# Altium PCB PCB1.PcbDoc (part 2 of 2)
Units mil, origin at the board's own origin, x right, y up, seen from the top; angles counter-clockwise.
Board outline 1023.62 x 2244.09 mil, 2 copper layers (Top Layer, Bottom Layer), stack 42.17 mil thick; 66 components, 139 nets, 332 pads, 153 vias.
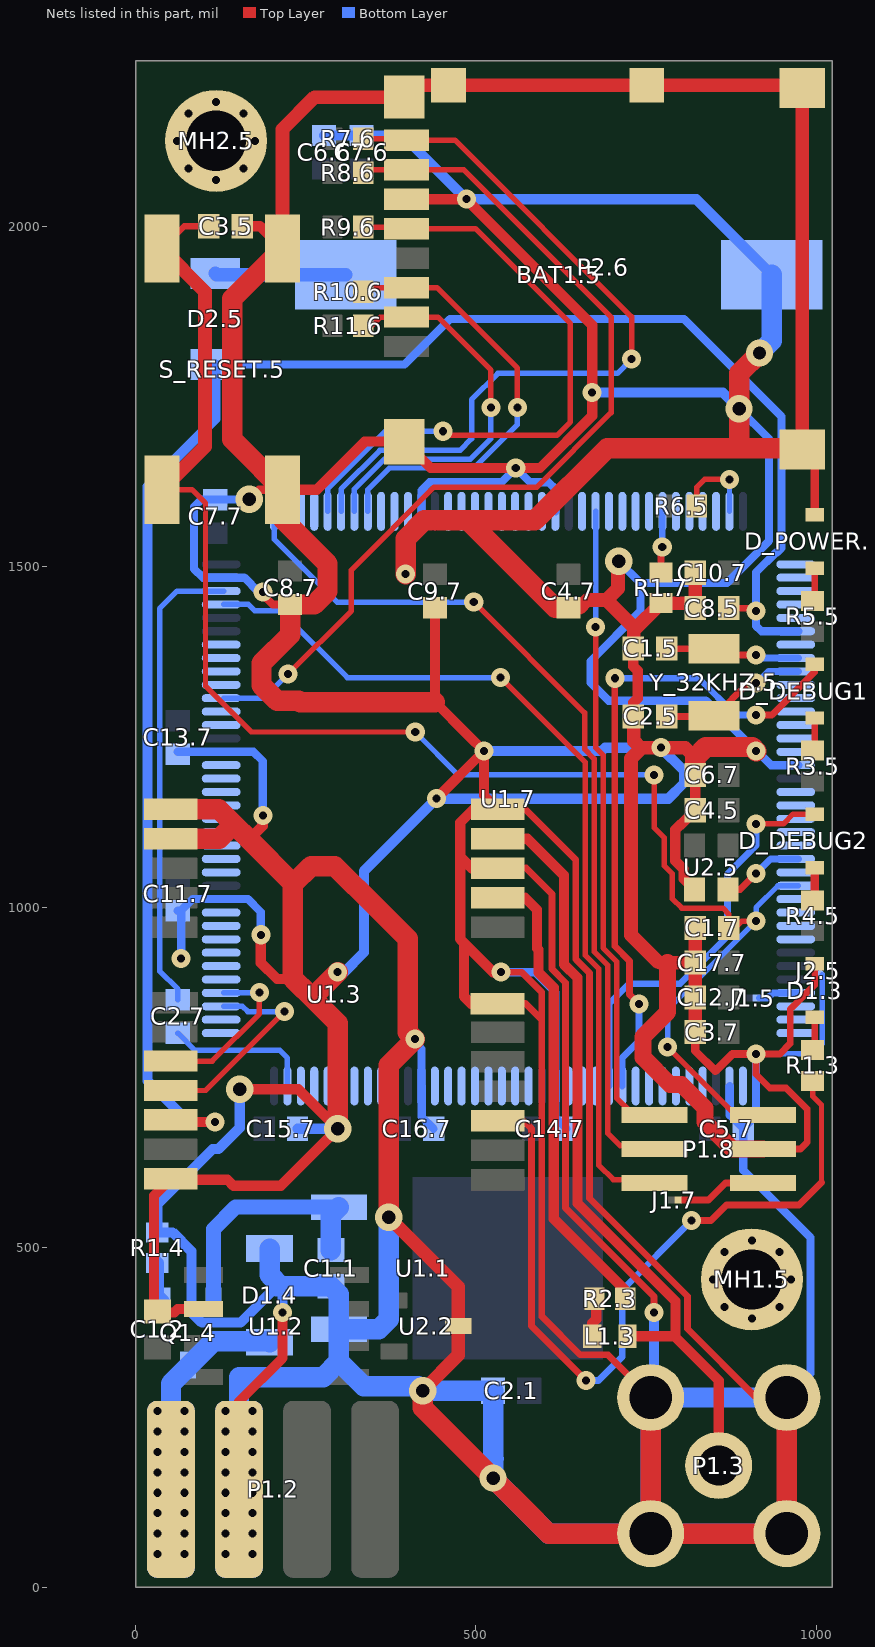
[diagram p2: the nets of this part, all layers, seen from the top]

## Via types
v1: diameter 23, hole 11.81, Top Layer to Bottom Layer, 64 vias
v2: diameter 28, hole 11.81, Top Layer to Bottom Layer, tented both sides, 57 vias
v3: diameter 28, hole 11.81, Top Layer to Bottom Layer, 16 vias
v4: diameter 40, hole 19.68, Top Layer to Bottom Layer, tented both sides, 14 vias
v5: diameter 43.31, hole 43.31, Top Layer to Bottom Layer, tented both sides, 1 vias
v6: diameter 55.12, hole 55.12, Top Layer to Bottom Layer, tented both sides, 1 vias

## Nets (pads, with @x,y where several pads share a name; then routed paths per layer and width w, separated by ;. In a path a pad name is that pad's centre, name@x,y a point inside that pad or via, vN(x,y) a via of type N, cw(c..) or ccw(c..) an arc to the next point about the centre after c; other vN are vias at no path point) (continued)
GND: BAT1.5.2 C1.1.1 C1.2.1 C1.5.1 C1.7.1 C2.1.1 C2.5.1 C3.5.1 C3.7.1 C4.5.1 C4.7.1 C5.7.1 C6.6.1 C6.7.1 C7.6.1 C7.7.1 C8.5.1 C8.7.1 C9.7.1 C10.7.1 C11.7.1 C12.7.1 C13.7.1 C14.7.1 C15.7.1 C16.7.1 C17.7.1 D1.3.2 D1.4.1 D_POWER.5.2 J2.5.1 MH1.5.MOUNTING MH2.5.MOUNTING P1.2.2 P1.3.2 P1.3.3 P1.3.4 P1.3.5 P1.8.3 P2.6.6 P2.6.GND R1.4.2 R1.7.1 S_RESET.5.2 S_RESET.5.4 U1.1.1 U1.2.2 U1.3.7 U1.3.10 U1.3.12 U1.3.13 U1.3.14 U1.3.24 U1.7.16 U1.7.38 U1.7.51 U1.7.61 U1.7.83 U1.7.94 U1.7.107 U1.7.120 U1.7.130 U2.2.3 U2.5.2 | length 23318.4
  Top Layer w10: v2@525.47,904.25 v2(536.81,904.25) 566.81,904.25 596.81,874.25 596.81,834.25 ; U1.3.7@531.65,858.03 573.03,858.03 596.81,834.25 ; U1.3.10@531.97,1057.17 573.9,1057.17 611.81,1019.25 611.81,908.75 631.81,888.75 631.81,557.53 761.81,427.53 v2(761.81,404.25) ; U1.3.12@531.97,1143.78 572.28,1143.78 646.81,1069.25 646.81,923.25 666.81,903.25 666.81,572.03 810.81,428.03 810.81,380.25 911.81,279.25 P1.3.5@956.81,279.25 ; P1.3.4@756.81,279.25 694.13,341.93 653.3,341.93 596.81,398.42 596.81,834.25 ; P1.8.3@921.81,644.25 976.81,644.25 986.81,654.25 986.81,703.43 955.99,734.25 931.81,734.25 911.81,754.25 v2(911.81,784.25) 946.81,784.25 961.81,799.25 961.81,849.25 997.81,885.25 D1.3.2@997.81,916.62
  Top Layer w12: v4(166.81,1599.25) 180.94,1613.39 S_RESET.5.2@215.67,1613.39 ; v2(186.81,1463.25) 186.81,1459.25 201.42,1444.65 C8.7.1@226.81,1444.65 ; C3.7.1@822.2,816.25 822.2,788.86 851.81,759.25 876.81,784.25 v2(911.81,784.25) ; P2.6.GND@979.35,1672.23 997.81,1653.76 D_POWER.5.2@997.81,1576.62
  Top Layer w15: U1.3.24@51.65,599.25 134.81,599.25 143.51,590.55 213.11,590.55 v4(296.81,674.25) 238.81,732.25 v4(152.81,732.25) ; U1.3.24@51.65,600.47 26.81,575.63 26.81,410.83 C1.2.1@31.81,405.83 33.39,404.25 56.81,404.25 61.81,409.25 U1.2.2@99.53,409.25 ; P1.2.2@151.81,144.25 151.81,273.25 215.67,337.11 v2(215.67,404.25) ; C3.5.1@156.69,2000.55 182.83,2000.55 S_RESET.5.4@215.67,1967.72 ; 166.81,1099.25 186.81,1119.25 v2(186.81,1134.25) ; v2(183.81,959.25) 183.81,918.25 207.81,894.25 231.81,894.25 ; S_RESET.5.2@215.67,1613.39 265.94,1613.39 336.6,1684.04 P2.6.GND@394.7,1684.04 433.49,1645.25 v2(558.48,1645.25) 594.23,1645.25 670.81,1721.83 v2(670.81,1756.25) 670.81,1855.25 v2(485.81,2040.25) 485.72,2040.34 P2.6.6@398.24,2040.34 ; P2.6.GND@394.7,2190.34 P2.6.GND@412.22,2207.86 ; C9.7.1@439.81,1439.65 439.81,1301.25 488.88,1252.19 v2(511.81,1229.25) ; v2(441.81,1159.25) v2(511.81,1229.25) ; U2.2.3@474.06,384.25 U2.2.3@474.31,384 ; v2@525.47,904.25 482.31,947.41 ; U1.3.7@531.65,858.03 493.03,858.03 482.31,868.75 482.31,947.41 ; U1.3.10@531.97,1057.17 493.9,1057.17 476.81,1074.25 ; C2.5.1@731.2,1280.25 731.2,1300.1 737.81,1306.7 737.81,1347.25 731.2,1353.86 C1.5.1@731.2,1380.25 ; P1.3.3@756.81,74.25 P1.3.3@756.81,79.25 ; U2.5.2@821.2,1025.77 805.31,1041.67 805.31,1055.48 792.96,1067.84 792.96,1113.63 800.28,1120.95 800.9,1120.95 C4.5.1@822.2,1142.25 C6.7.1@822.2,1194.25 ; P2.6.GND@975.21,2207.86 P2.6.GND@979.35,2203.72 ; 476.81,1074.25 476.81,952.91 482.31,947.41 ; 476.81,1074.25 476.81,1124.25 496.34,1143.78 U1.3.12@531.97,1143.78 511.81,1163.94 v2(511.81,1229.25)
  Top Layer w20: S_RESET.5.4@215.67,1967.72 215.67,2143.11 262.9,2190.34 P2.6.GND@394.7,2190.34 ; v4(371.81,544.25) 474.06,442.01 U2.2.3@474.06,384.25 474.06,341.5 v4(421.81,289.25) ; P2.6.GND@412.22,2207.86 P2.6.GND@459.66,2207.86 P2.6.GND@751,2207.86 P2.6.GND@975.21,2207.86 ; C4.7.1@635.81,1439.65 652.12,1439.65 663.73,1451.25 691.89,1451.25 ; v4(709.81,1508.25) 708.81,1507.25 708.81,1468.17 691.89,1451.25 ; C2.5.1@734.81,1283.86 C2.5.1@731.2,1280.25 732.2,1243.86 741.81,1234.25 ; C1.5.1@734.81,1376.65 C1.5.1@731.2,1380.25 732.2,1407.01 ; 766.81,919.91 727.81,958.91 727.81,1218.34 741.81,1232.34 741.81,1234.25 ; 770.81,918.25 781.81,918.25 C17.7.1@822.2,918.25 ; C3.7.1@822.2,816.25 C12.7.1@822.2,867.25 C17.7.1@822.2,918.25 ; C1.7.1@822.2,969.25 C17.7.1@822.2,918.25 ; 822.2,1219.65 807.6,1234.25 v2(771.81,1234.25) 741.81,1234.25 ; C10.7.1@822.2,1491.25 C8.5.1@822.2,1439.25 814.84,1446.61 R1.7.1@771.81,1446.61 732.2,1407.01 ; P2.6.GND@979.35,1672.23 P2.6.GND@979.35,2203.72 ; 691.89,1451.25 732.2,1410.94 732.2,1407.01
  Top Layer w25: 781.81,918.25 781.81,845.87 745.31,809.37 745.31,779.13 785.19,739.25 802.15,739.25 836.81,704.59 836.81,684.25 876.81,644.25 P1.8.3@921.81,644.25
  Top Layer w30: U1.3.14@51.65,1100.47 123.03,1100.47 144.31,1121.75 ; U1.3.13@51.65,1143.78 122.28,1143.78 144.31,1121.75 ; S_RESET.5.4@215.67,1967.72 141.81,1893.86 141.81,1698.62 141.81,1687.24 152.87,1676.18 S_RESET.5.2@215.67,1613.39 215.67,1570.39 281.81,1504.25 281.81,1464.25 262.2,1444.65 C8.7.1@226.81,1444.65 226.81,1400.41 184.81,1358.41 184.81,1326.1 207.66,1303.25 239.97,1303.25 241.97,1301.25 439.81,1301.25 ; 231.81,1034.25 231.73,1034.33 166.81,1099.25 144.31,1121.75 ; v4(296.81,674.25) 296.81,829.25 265.81,860.25 265.81,860.41 254.39,871.83 ; v2(296.81,904.25) 264.39,871.83 254.39,871.83 ; v4(371.81,544.25) 371.81,767.25 v2(410.31,805.75) 399.81,816.25 399.81,953.25 354.88,998.19 292.81,1060.25 257.66,1060.25 230.81,1033.41 230.81,895.25 231.81,894.25 242.81,883.25 242.97,883.25 254.39,871.83 ; v2(396.81,1489.25) 396.81,1541.41 423.66,1568.25 487.81,1568.25 ; v4(421.81,289.25) 421.81,264.25 481.38,204.69 v4(525.24,160.83) 571.38,114.69 606.81,79.25 P1.3.3@756.81,79.25 ; C4.7.1@635.81,1439.65 616.42,1439.65 487.81,1568.25 ; P1.3.4@756.81,279.25 P1.3.3@756.81,79.25 ; C6.7.1@822.2,1194.25 822.2,1219.65 837.81,1235.25 905.81,1235.25 v2(911.81,1229.25) ; v4(916.81,1814.25) 886.81,1784.25 v4(886.81,1732.25) 886.81,1674.25 ; P1.3.5@956.81,279.25 P1.3.2@956.81,79.25 875.32,79.25 P1.3.3@756.81,79.25 ; P2.6.GND@979.35,1672.23 977.32,1674.25 886.81,1674.25 ; 487.81,1568.25 586.81,1568.25 692.81,1674.25 815.32,1674.25 886.81,1674.25
  Bottom Layer w8: v2(911.81,784.25) 993.81,784.25 1008.81,799.25 J2.5.1@1008.81,900.25
  Bottom Layer w12: C11.7.1@61.81,994.65 C11.7.1@66.81,994.65 ; C13.7.1@61.81,1228.15 U1.7.94@125.57,1228.15 172.91,1228.15 186.81,1214.25 v2(186.81,1134.25) ; v2(66.81,924.25) C11.7.1@66.81,994.65 ; U1.7.107@125.57,1484.06 98.71,1484.06 85.81,1496.95 85.81,1588.25 96.42,1598.86 C7.7.1@116.81,1598.86 166.42,1598.86 v4(166.81,1599.25) ; U1.7.107@129.57,1484.06 159.58,1484.06 180.38,1463.25 v2(186.81,1463.25) ; v2(183.81,959.25) 183.81,992.84 165.04,1011.61 U1.7.83@125.57,1011.61 83.78,1011.61 C11.7.1@66.81,994.65 ; v2(396.81,1489.25) 396.81,1529.25 419.86,1552.3 U1.7.120@419.86,1581.5 419.86,1612.3 431.81,1624.25 537.48,1624.25 v2(558.48,1645.25) 579.48,1624.25 606.81,1624.25 616.71,1614.35 U1.7.130@616.71,1581.5 ; v2(410.31,805.75) 410.31,800.75 419.86,791.2 U1.7.61@419.86,737.01 ; U1.7.61@420.25,737.01 420.25,691.81 C16.7.1@437.81,674.25 ; v2(536.81,904.25) 586.81,904.25 616.71,874.35 U1.7.51@616.71,737.01 ; U1.7.51@617.1,737.01 617.1,689.96 C14.7.1@632.81,674.25 ; v4(709.81,1508.25) 741.81,1476.25 ; U1.7.38@873.01,737.01 873.01,694.06 C5.7.1@892.81,674.25 ; v4(886.81,1732.25) 930.81,1688.25 930.81,1538.25 868.81,1476.25 741.81,1476.25 ; v2(911.81,784.25) 911.81,693.25 C5.7.1@892.81,674.25 ; P1.3.5@956.81,279.25 991.81,314.25 991.81,514.25 892.81,613.25 C5.7.1@892.81,674.25 ; U1.7.16@974.06,1208.46 U1.7.16@970.06,1208.46 933.61,1208.46 912.82,1229.25 v2(911.81,1229.25) 837.81,1303.25 694.63,1303.25 668.19,1329.69 668.19,1361.25 741.81,1434.87 741.81,1476.25
  Bottom Layer w15: v4(152.81,732.25) 152.81,675.7 121.36,644.25 112.81,644.25 31.81,563.25 R1.4.2@31.81,521.89 54.17,521.89 81.81,494.25 81.81,404.72 97.22,389.31 153.96,389.31 207.32,442.68 215.67,434.33 v2(215.67,404.25) ; C15.7.1@237.81,674.25 v4(296.81,674.25) ; C6.6.1@276.81,2133.86 C7.6.1@331.81,2133.86 392.2,2133.86 v2(485.81,2040.25) 823.8,2040.25 BAT1.5.2@934.8,1929.25 ; v2(296.81,904.25) 306.36,904.25 335.31,933.2 335.31,1052.75 v2(441.81,1159.25) 782.81,1159.25 805.81,1182.25 805.81,1200.25 v2(771.81,1234.25) 689.81,1234.25 684.81,1229.25 v2(511.81,1229.25) ; 525.24,180.83 533.66,189.25 ; v2(670.81,1756.25) 862.81,1756.25 v4(886.81,1732.25) ; P1.3.4@756.81,279.25 761.81,284.25 v2(761.81,404.25)
  Bottom Layer w30: P1.2.2@151.81,144.25 151.81,309.25 275.35,309.25 298.58,332.48 ; D1.4.1@196.81,498.15 196.81,459.25 213.39,442.68 ; 207.32,442.68 213.39,442.68 ; v4(371.81,544.25) 371.81,394.25 357.05,379.49 U1.1.1@298.58,379.49 ; v4(916.81,1814.25) 934.8,1832.24 BAT1.5.2@934.8,1929.25 ; P1.3.2@956.81,79.25 P1.3.3@756.81,79.25 ; P1.3.5@956.81,279.25 P1.3.4@756.81,279.25 P1.3.3@756.81,79.25 ; 213.39,442.68 C1.1.1@286.81,442.68 298.58,430.91 U1.1.1@298.58,379.49 ; 298.58,332.48 U1.1.1@298.58,379.49 ; 298.58,332.48 335.31,295.75 415.31,295.75 v4(421.81,289.25) C2.1.1@525.24,289.25 525.24,180.83 v4(525.24,160.83) 606.81,79.25 P1.3.3@756.81,79.25
  other v1: 131.81,49.25 171.81,49.25 131.81,79.25 171.81,79.25 131.81,109.25 171.81,109.25 131.81,139.25 171.81,139.25 131.81,169.25 171.81,169.25 131.81,199.25 171.81,199.25 131.81,229.25 171.81,229.25 131.81,259.25 171.81,259.25
  other v3: 905.51,395.47 865.01,412.25 946.02,412.25 848.23,452.76 962.8,452.76 865.01,493.26 946.02,493.26 905.51,510.04 118.11,2068.7 77.6,2085.48 158.62,2085.48 60.83,2125.98 175.39,2125.98 77.6,2166.49 158.62,2166.49 118.11,2183.27
NetBAT1.5_1: BAT1.5.1 D2.5.1 | length 195.5
  Bottom Layer w15: BAT1.5.1@306.89,1931.18 BAT1.5.1@308.82,1929.25
  Bottom Layer w20: D2.5.1@116.81,1931.18 118.74,1929.25 BAT1.5.1@308.82,1929.25
NetC2.7_1: C2.7.1 U1.7.106 | length 690.9
  Bottom Layer w8: C2.7.1@61.81,863.86 61.81,879.25 35.09,905.97 35.09,1438.54 60.93,1464.37 U1.7.106@129.57,1464.37
NetC2.7_2: C2.7.2 U1.7.71 | length 217.4
  Bottom Layer w8: C2.7.2@61.81,814.65 87.2,789.25 211.81,789.25 223.01,778.06 U1.7.71@223.01,737.01
NetD1.3_1: D1.3.1 R1.3.1 | length 49.2
  Top Layer w10: R1.3.1@994.81,789.89 997.81,792.89 D1.3.1@997.81,837.88
NetD_DEBUG1.5_1: D_DEBUG1.5.1 R3.5.2 | length 49.2
  Top Layer w10: R3.5.2@994.81,1229.89 997.81,1232.89 D_DEBUG1.5.1@997.81,1277.88
NetD_DEBUG2.5_1: D_DEBUG2.5.1 R4.5.2 | length 49.2
  Top Layer w12: R4.5.2@994.81,1009.89 997.81,1012.89 D_DEBUG2.5.1@997.81,1057.88
NetD_POWER.5_1: D_POWER.5.1 R5.5.1 | length 49.2
  Top Layer w10: R5.5.1@994.81,1449.89 997.81,1452.89 D_POWER.5.1@997.81,1497.88
NetL1.3_1: L1.3.1 P1.3.1 U1.3.11 | length 1164.9
  Top Layer w15: U1.3.11@531.97,1100.47 575.59,1100.47 629.31,1046.75 629.31,916 649.31,896 649.31,564.78 793.31,420.78 793.31,367.75 ; L1.3.1@722.8,369.25 791.81,369.25 793.31,367.75 ; P1.3.1@856.81,179.25 871.81,194.25 871.81,201.28 856.81,216.28 856.81,304.25 793.31,367.75
NetL1.3_2: L1.3.2 R2.3.1 | length 39.6
  Top Layer w15: 670.83,388.27 676.81,394.25 676.81,421.61 R2.3.1@674.17,424.25
NetQ1.4_1: Q1.4.1 R1.4.1 | length 58.3
  Bottom Layer w20: R1.4.1@31.81,476.61 31.81,429.09 Q1.4.1@39.41,421.5
NetR1.3_2: R1.3.2 U1.3.3 | length 1136.8
  Top Layer w8: R1.3.2@994.81,744.61 994.81,722.25 1007.81,709.25 1007.81,595.25
  Top Layer w10: U1.3.3@531.81,685.87 570.2,685.87 581.81,674.25 581.81,384.25 v2(661.81,304.25) ; v2(816.81,539.25) 845.32,539.25 868.31,562.24 974.8,562.24 1007.81,595.25
  Bottom Layer w10: v2(661.81,304.25) 680.13,304.25 715.13,339.25 715.13,437.57 v2(816.81,539.25)
NetR1.7_2: R1.7.2 U1.7.138 | length 93.4
  Top Layer w10: R1.7.2@771.81,1491.89 R1.7.2@771.81,1494.89 ; R1.7.2@773.81,1492.89 R1.7.2@771.81,1494.89 ; v2(773.81,1529.25) 771.81,1527.25 R1.7.2@771.81,1494.89
  Bottom Layer w10: v2(773.81,1529.25) 773.81,1581.12 U1.7.138@774.19,1581.5
NetR2.3_2: R2.3.2 U1.3.9 | length 688
  Top Layer w15: U1.3.9@531.97,1013.86 572.2,1013.86 589.81,996.25 589.81,939.22 ; 591.81,937.22 591.81,904 614.31,881.5 614.31,541.75 719.45,436.61 R2.3.2@719.45,424.25
NRST: C1.7.2 C3.5.2 P1.8.5 S_RESET.5.1 S_RESET.5.3 U1.7.25 | length 2409.7
  Top Layer w8: S_RESET.5.1@38.5,1613.39 82.68,1613.39 102.54,1593.52 102.54,1324.52 169.81,1257.25 v2(410.81,1257.25) ; v2(761.81,1194.25) 761.81,1116.67 776.46,1102.02 776.46,1061 788.81,1048.65 788.81,1011.97 802.53,998.25 862.81,998.25 871.81,989.25 871.81,969.25 880.81,969.25 890.81,979.25 v2(911.81,979.25) ; v2(781.81,794.25) 881.81,694.25 P1.8.5@921.81,694.25
  Top Layer w10: S_RESET.5.3@38.5,1967.72 71.34,2000.55 C3.5.2@107.48,2000.55
  Top Layer w20: S_RESET.5.1@38.5,1613.39 101.81,1676.69 101.81,1904.41 S_RESET.5.3@38.5,1967.72
  Bottom Layer w8: v2(410.81,1257.25) 473.81,1194.25 v2(761.81,1194.25) ; v2(781.81,794.25) 781.81,849.25 v2(911.81,979.25) 911.81,999.25 943.86,1031.3 U1.7.25@974.06,1031.3
OSC32_IN: C1.5.2 U1.7.8 Y_32KHZ.5.1 | length 199.4
  Top Layer w10: C1.5.2@781.42,1380.25 782.2,1379.46 851.81,1379.46 862.6,1379.46 872.81,1369.25 873.81,1370.25 v2(911.81,1370.25)
  Bottom Layer w10: v2(911.81,1370.25) 916.12,1365.94 U1.7.8@974.06,1365.94
OSC32_OUT: C2.5.2 U1.7.9 Y_32KHZ.5.2 | length 220
  Top Layer w10: C2.5.2@781.42,1280.25 851.02,1280.25 851.81,1281.04 900.02,1329.25 v2(911.81,1329.25)
  Bottom Layer w10: v2(911.81,1329.25) 912.82,1329.25 929.83,1346.26 U1.7.9@974.06,1346.26
OSC_IN: U1.7.23 U2.5.3 | length 122.2
  Top Layer w10: U2.5.3@870.42,1025.77 888.33,1025.77 v2(911.81,1049.25)
  Bottom Layer w10: v2(911.81,1049.25) 933.23,1070.67 U1.7.23@974.06,1070.67
OSC_OUT: U1.7.24
PA0: U1.7.34
PA1: U1.7.35
PA2: U1.7.36
PA3: U1.7.37
PA4: U1.7.40
PA5: U1.7.41
PA6: U1.7.42
PA7: U1.7.43
PA8: U1.7.100
PA9: U1.7.101
PA10: U1.7.102
PA15: U1.7.110
PB0: D_DEBUG1.5.2 U1.7.46 | length 977.9
  Top Layer w10: v2(704.06,1336.25) 704.06,942.37 725.81,920.61 725.81,871.25 v2(739.81,857.25) ; v2(911.81,1282.25) 934.81,1282.25 997.81,1345.25 D_DEBUG1.5.2@997.81,1356.62
  Bottom Layer w10: v2(704.06,1336.25) 827.44,1336.25 881.44,1282.25 v2(911.81,1282.25) ; U1.7.46@715.13,737.01 715.13,778.57 739.81,803.25 v2(739.81,857.25)
PB1: D_DEBUG2.5.2 U1.7.47 | length 610.9
  Top Layer w8: v2(911.81,1122.25) 951.81,1122.25 966.18,1136.62 D_DEBUG2.5.2@997.81,1136.62
  Bottom Layer w10: U1.7.47@695.45,737.01 695.45,857.89 724.81,887.25 800.01,887.25 869.81,957.05 869.81,1048.26 911.81,1090.26 v2(911.81,1122.25)
PB2: U1.7.48
PB4: U1.7.134
PB5: U1.7.135
PB6: U1.7.136
PB7: U1.7.137
PB8: U1.7.139
PB9: U1.7.140
PB10: U1.7.69
PB11: U1.7.70
PB12: U1.7.73
PB13: U1.7.74
PB14: U1.3.21 U1.7.75 | length 307.7
  Top Layer w8: U1.3.21@51.65,730.39 102.87,730.39 218.73,846.25 v2(218.81,846.25)
  Bottom Layer w8: U1.7.75@129.57,854.13 156.93,854.13 164.81,846.25 v2(218.81,846.25)
PB15: U1.3.20 U1.7.76 | length 242.5
  Top Layer w8: U1.3.20@51.65,773.7 112.43,773.7 181.81,843.08 v2(181.81,874.25)
  Bottom Layer w8: U1.7.76@129.57,873.82 181.38,873.82 v2(181.81,874.25)
PC0: U1.7.26
PC1: U1.7.27
PC2: U1.7.28
PC3: U1.7.29
PC4: U1.7.44
PC5: U1.7.45
PC6: U1.7.96
PC7: U1.7.97
PC8: P2.6.7 R8.6.1 U1.7.98 | length 1374.6
  Top Layer w8: v2(223.81,1342.25) 316.81,1435.25 316.81,1495.35 438.72,1617.25 589.56,1617.25 698.81,1726.5 698.81,1866.85 482.02,2083.65 P2.6.7@398.24,2083.65 338.84,2083.65 R8.6.1@334.45,2079.25
  Bottom Layer w8: U1.7.98@129.57,1306.89 188.45,1306.89 v2(223.81,1342.25)
PC9: U1.7.99
PC10: U1.7.111
PC11: U1.7.112
PC12: P2.6.5 R9.6.1 U1.7.113 | length 942.6
  Top Layer w8: R9.6.1@334.45,1999.25 396.02,1999.25 P2.6.5@398.24,1997.03 499.03,1997.03 638.81,1857.25 638.81,1713.17 618.89,1693.25 457.81,1693.25 v2(451.81,1699.25)
  Bottom Layer w8: U1.7.113@282.06,1581.5 282.06,1614.14 367.17,1699.25 v2(451.81,1699.25)
PC13: U1.7.7
PD0: P2.6.8 R7.6.1 U1.7.114 | length 1137.5
  Top Layer w8: R7.6.1@334.45,2129.25 395.94,2129.25 P2.6.8@398.24,2126.95 469.11,2126.95 728.81,1867.25 v2(728.81,1805.25)
  Bottom Layer w8: U1.7.114@301.75,1581.5 301.75,1614.14 358.86,1671.25 476.81,1671.25 493.81,1688.25 493.81,1745.85 532.21,1784.25 707.81,1784.25 v2(728.81,1805.25)
PD1: P2.6.2 R11.6.1 U1.7.115 | length 589.7
  Top Layer w8: R11.6.1@334.45,1854.25 346.81,1854.25 359.67,1867.11 P2.6.2@398.24,1867.11 443.95,1867.11 521.81,1789.25 v2(521.81,1734.25)
  Bottom Layer w8: U1.7.115@321.43,1581.5 321.43,1614.14 365.54,1658.25 491.81,1658.25 521.81,1688.25 v2(521.81,1734.25)
PD2: P2.6.3 R10.6.1 U1.7.116 | length 652.4
  Top Layer w8: R10.6.1@334.45,1904.25 340.61,1910.42 P2.6.3@398.24,1910.42 442.59,1910.42 560.81,1792.19 v2(560.81,1734.25)
  Bottom Layer w8: U1.7.116@341.12,1581.5 341.12,1613.56 372.81,1645.25 497.2,1645.25 560.81,1708.87 v2(560.81,1734.25)
PD3: U1.7.117
PD4: U1.7.118
PD5: U1.7.119
PD6: U1.7.122
PD7: U1.7.123
PD8: U1.7.77
PD9: U1.7.78
PD10: U1.7.79
PD11: U1.7.80
PD12: U1.7.81
PD13: U1.7.82
PD14: U1.7.85
PD15: U1.7.86
PDR_ON: R6.5.1 U1.7.143 | length 127.5
  Top Layer w8: R6.5.1@824.45,1589.25 824.45,1616.89 836.01,1628.45 v2(872.61,1628.45)
  Bottom Layer w8: U1.7.143@872.61,1581.5 v2(872.61,1628.45)
PE0: U1.7.141
PE1: U1.7.142
PE2: U1.7.1
PE3: U1.7.2
PE4: U1.7.3
PE5: U1.7.4
PE6: U1.7.5
PE7: U1.7.58
PE8: U1.7.59
PE9: U1.7.60
PE10: U1.7.63
PE11: U1.7.64
PE12: U1.7.65
PE13: U1.7.66
PE14: U1.7.67
PE15: U1.7.68
PF0: U1.7.10
PF1: U1.7.11
PF2: U1.7.12
PF3: U1.7.13
PF4: U1.7.14
PF5: U1.7.15
PF6: U1.7.18
PF7: U1.7.19
PF8: U1.7.20
PF9: U1.7.21
PF10: U1.7.22
PF11: U1.7.49
PF12: U1.7.50
PF13: U1.7.53
PF14: U1.7.54
PF15: U1.7.55
PG0: U1.7.56
PG1: U1.7.57
PG2: U1.7.87
PG3: U1.7.88
PG4: U1.7.89
PG5: U1.7.90
PG6: U1.7.91
PG7: U1.7.92
PG8: U1.7.93
PG9: U1.7.124
PG10: U1.7.125
PG11: U1.7.126
PG12: U1.7.127
PG13: U1.7.128
PG14: U1.7.129
PG15: U1.7.132
SWCLK: P1.8.4 U1.7.109 | length 1311.2
  Top Layer w8: v2(496.81,1448.25) 659.81,1285.25 659.81,1231.92 673.81,1217.92 673.81,934.43 693.81,914.43 693.81,667.25 711.81,649.25 P1.8.4@762.36,649.25
  Bottom Layer w8: U1.7.109@203.32,1581.5 203.32,1540.74 295.81,1448.25 v2(496.81,1448.25)
SWDIO: P1.8.2 U1.7.105 | length 1298.2
  Top Layer w8: v2(536.18,1337.17) 660.81,1212.54 660.81,929.05 680.81,909.05 680.81,620.25 701.81,599.25 P1.8.2@742.36,599.25
  Bottom Layer w8: U1.7.105@129.57,1444.69 165.78,1444.69 175.21,1435.25 212.84,1435.25 310.91,1337.17 v2(536.18,1337.17)
SWO: P1.8.6 U1.7.133 | length 938.9
  Top Layer w8: v2(675.76,1411.25) 675.76,1234.36 686.81,1223.31 686.81,939.82 706.81,919.82 706.81,719.25 726.81,699.25 P1.8.6@762.36,699.25
  Bottom Layer w8: v2(675.76,1411.25) U1.7.133@675.76,1581.5
VBAT: C8.5.2 D2.5.2 U1.3.22 U1.7.6 | length 2635.5
  Top Layer w10: C8.5.2@871.42,1439.25 907.81,1439.25 v2(911.81,1435.25)
  Top Layer w15: U1.3.22@51.65,687.09 54.49,684.25 v2(116.81,684.25)
  Bottom Layer w12: D2.5.2@116.81,1797.32 394.88,1797.32 461.81,1864.25 805.72,1864.25 948.85,1721.12 948.85,1527.74 942.33,1521.21 940.98,1521.21 911.81,1492.04 v2(911.81,1435.25) 911.81,1413 919.5,1405.32 U1.7.6@974.06,1405.32
  Bottom Layer w15: v2(116.81,684.25) 77.5,684.25 17.5,744.25 17.5,1618.01 116.81,1717.32 D2.5.2@116.81,1797.32
VCC: D1.4.2 P1.2.1 Q1.4.3 | length 326.7
  Bottom Layer w30: P1.2.1@51.81,144.25 51.81,299.25 114.31,361.75 171.35,361.75 171.61,362.01 195.16,362.01 D1.4.2@196.81,360.35
  other v1: 31.81,49.25 71.81,49.25 31.81,79.25 71.81,79.25 31.81,109.25 71.81,109.25 31.81,139.25 71.81,139.25 31.81,169.25 71.81,169.25 31.81,199.25 71.81,199.25 31.81,229.25 71.81,229.25 31.81,259.25 71.81,259.25
VCC_SAFE: C1.1.2 Q1.4.2 U1.1.3 | length 371
  Bottom Layer w22: Q1.4.2@114.21,421.5 114.21,526.65 146.57,559.02 U1.1.3@298.58,559.02
  Bottom Layer w30: C1.1.2@286.81,495.83 286.81,547.24 U1.1.3@298.58,559.02
VDD_TARGET: J1.7.2 P1.8.1 | length 130.4
  Top Layer w10: 801.81,569.25 841.81,569.25 866.81,594.25 P1.8.1@921.81,594.25
VDDA: J1.5.2 U1.7.33 | length 61.2
  Bottom Layer w10: 916.81,866.25 928.81,866.25 936.38,873.82 U1.7.33@970.06,873.82 ; U1.7.33@969.49,873.25 U1.7.33@970.06,873.82 ; U1.7.33@974.06,873.82 U1.7.33@970.06,873.82
pads on no net: P2.6.1 U1.2.5 U1.2.8 U1.3.1 U1.3.4 U1.3.5 U1.3.6 U1.3.8 U1.3.15 U1.3.16 U1.3.17 U1.3.18 U1.3.19
copper on no net:
  other v5: 474.17,1929.25
  other v6: 769.45,1929.25

## Polygon pours and split planes (outlines as drawn)
GND on Bottom Layer "Bottom Layer-GND" (solid, remove dead copper, shelved, pour order 2): -13.19,2259.25 1036.81,2259.25 1036.81,-15.75 -13.19,-15.75
GND on Top Layer "Top Layer-GND" (solid, remove dead copper, shelved, pour order 0): -13.19,2259.25 -13.19,-15.75 1036.81,-15.75 1036.81,2259.25

## Keep-outs
Keep-Out Layer:
  the board outline again, w10

## Silkscreen, mask and mechanical layers (free items; w line width, h text height)
Top Overlay:
  drawing of 45 lines, arcs and shapes, not listed
  text "Data Logger 2.0" at 610.18,1172.25 h30 r270
  text "SWO" at 609.18,700.06 h20 r270
  text "NRST" at 647.18,700.06 h20 r270
  text "CLK" at 609.18,610.06 h20 r270
  text "GND" at 647.18,609.06 h20 r270
  text "DIO" at 610.18,538.06 h20 r270
  text "VDD" at 647.18,538.06 h20 r270
  text "VCC-12V" at 436.81,99.25 h30 r90
  text "GND" at 476.81,84.25 h30 r90
  text "CANH" at 516.81,69.25 h30 r90
  text "CANL" at 556.81,54.25 h30 r90
Bottom Overlay:
  lines w5: 91.81,284.25 101.81,294.25 131.81,324.25 356.81,324.25 426.81,254.25 ; 191.81,284.25 201.81,294.25 221.81,314.25 391.81,314.25 471.81,234.25 471.81,164.25 ; 286.81,284.25 296.81,294.25 306.81,304.25 426.81,304.25 516.81,214.25 516.81,194.25 516.81,164.25 ; 386.81,284.25 396.81,294.25 461.81,294.25 561.81,194.25 561.81,164.25
  text "GND" at 456.81,69.25 h30 r270
  text "VCC-12V" at 411.81,39.25 h30 r270
  text "CANH" at 501.81,39.25 h30 r270
  text "CANL" at 546.81,39.25 h30 r270
Drill Drawing:
  circle w10: c100.62,2937.41 r33.33
  lines w10: 67.29,2604.07 100.62,2620.74 133.96,2604.07 117.29,2637.41 133.96,2670.74 100.62,2654.07 67.29,2670.74 83.96,2637.41 67.29,2604.07 ; 67.29,2770.74 83.96,2770.74 100.62,2754.07 117.29,2770.74 133.96,2770.74 117.29,2787.41 133.96,2804.07 117.29,2804.07 100.62,2820.74 83.96,2804.07 67.29,2804.07 83.96,2787.41 67.29,2770.74 ; 67.29,3070.74 83.96,3070.74 83.96,3054.07 117.29,3054.07 117.29,3070.74 133.96,3070.74 133.96,3104.07 117.29,3104.07 117.29,3120.74 83.96,3120.74 83.96,3104.07 67.29,3104.07 67.29,3070.74 ; 67.29,3270.74 133.96,3270.74 100.62,3204.07 67.29,3270.74 ; 67.29,3387.41 100.62,3354.07 133.96,3387.41 100.62,3420.74 67.29,3387.41 ; 67.29,3504.07 67.29,3520.74 83.96,3537.41 67.29,3554.07 67.29,3570.74 83.96,3570.74 100.62,3554.07 117.29,3570.74 133.96,3570.74 133.96,3554.07 117.29,3537.41 133.96,3520.74 133.96,3504.07 117.29,3504.07 100.62,3520.74 83.96,3504.07 67.29,3504.07
  lines w15: 7.5,2559.07 10968.44,2559.07 ; 7.5,3609.07 10968.44,3609.07 ; 558.38,2409.07 558.38,3759.07 ; 1158.22,2409.07 1158.22,3759.07 ; 2277.89,2409.07 2277.89,3759.07 ; 2783.77,2409.07 2783.77,3759.07 ; 3517.57,2409.07 3517.57,3759.07 ; 5017.12,2409.07 5017.12,3759.07 ; 5606.97,2409.07 5606.97,3759.07 ; 6352.77,2409.07 6352.77,3759.07 ; 7402.46,2409.07 7402.46,3759.07 ; 8256.22,2409.07 8256.22,3759.07 ; 9589.83,2409.07 9589.83,3759.07 ; 7.5,2409.07 10968.44,2409.07 10968.44,3759.07 7.5,3759.07 7.5,2409.07
  text "Symbol" at 97.5,3654.07 h72
  text "Count" at 603.38,3654.07 h72
  text "Hole Size" at 1203.22,3654.07 h72
  text "Plated" at 2322.89,3654.07 h72
  text "Hole Type" at 2828.77,3654.07 h72
  text "Drill Layer Pair" at 3562.57,3654.07 h72
  text "Via/Pad" at 5062.12,3654.07 h72
  text "Pad Shape" at 5651.97,3654.07 h72
  text "Template" at 6397.77,3654.07 h72
  text "Description" at 7447.46,3654.07 h72
  text "Hole Tolerance (+)" at 8301.22,3654.07 h72
  text "Hole Tolerance (-)" at 9634.83,3654.07 h72
  text "1" at 603.38,3504.07 h60
  text "1,100mm (43,31mil)" at 1203.22,3504.07 h60
  text "PTH" at 2322.89,3504.07 h60
  text "Round" at 2828.77,3504.07 h60
  text "Top Layer - Bottom Layer" at 3562.57,3504.07 h60
  text "Via" at 5062.12,3504.07 h60
  text "Rounded" at 5651.97,3504.07 h60
  text "v110h110m0mx0" at 6397.77,3504.07 h60
  text "1" at 603.38,3354.07 h60
  text "1,400mm (55,12mil)" at 1203.22,3354.07 h60
  text "PTH" at 2322.89,3354.07 h60
  text "Round" at 2828.77,3354.07 h60
  text "Top Layer - Bottom Layer" at 3562.57,3354.07 h60
  text "Via" at 5062.12,3354.07 h60
  text "Rounded" at 5651.97,3354.07 h60
  text "v140h140m0mx0" at 6397.77,3354.07 h60
  text "1" at 603.38,3204.07 h60
  text "1,500mm (59,06mil)" at 1203.22,3204.07 h60
  text "PTH" at 2322.89,3204.07 h60
  text "Round" at 2828.77,3204.07 h60
  text "Top Layer - Bottom Layer" at 3562.57,3204.07 h60
  text "Pad" at 5062.12,3204.07 h60
  text "Rounded" at 5651.97,3204.07 h60
  text "c250h150" at 6397.77,3204.07 h60
  text "2" at 603.38,3054.07 h60
  text "2,250mm (88,58mil)" at 1203.22,3054.07 h60
  text "PTH" at 2322.89,3054.07 h60
  text "Round" at 2828.77,3054.07 h60
  text "Top Layer - Bottom Layer" at 3562.57,3054.07 h60
  text "Pad" at 5062.12,3054.07 h60
  text "Rounded" at 5651.97,3054.07 h60
  text "c380h225m380p380" at 6397.77,3054.07 h60
  text "4" at 603.38,2904.07 h60
  text "1,600mm (62,99mil)" at 1203.22,2904.07 h60
  text "PTH" at 2322.89,2904.07 h60
  text "Round" at 2828.77,2904.07 h60
  text "Top Layer - Bottom Layer" at 3562.57,2904.07 h60
  text "Pad" at 5062.12,2904.07 h60
  text "Rounded" at 5651.97,2904.07 h60
  text "c250h160" at 6397.77,2904.07 h60
  text "14" at 603.38,2754.07 h60
  text "0,500mm (19,69mil)" at 1203.22,2754.07 h60
  text "PTH" at 2322.89,2754.07 h60
  text "Round" at 2828.77,2754.07 h60
  text "Top Layer - Bottom Layer" at 3562.57,2754.07 h60
  text "Via" at 5062.12,2754.07 h60
  text "Rounded" at 5651.97,2754.07 h60
  text "v102h50m0mx0" at 6397.77,2754.07 h60
  text "via 0.5mm 1mm" at 7447.46,2754.07 h60
  text "315" at 603.38,2604.07 h60
  text "0,300mm (11,81mil)" at 1203.22,2604.07 h60
  text "PTH" at 2322.89,2604.07 h60
  text "Round" at 2828.77,2604.07 h60
  text "Top Layer - Bottom Layer" at 3562.57,2604.07 h60
  text "Via" at 5062.12,2604.07 h60
  text "Rounded" at 5651.97,2604.07 h60
  text "(Mixed)" at 6397.77,2604.07 h60
  text "(Mixed)" at 7447.46,2604.07 h60
  text "338 Total" at 603.38,2454.07 h60

## Dimensions
1023.62,0 to 0,0 on Mechanical 15
1023.62,0 to 1023.62,2244.09 on Mechanical 15